# EAGLE board INCUBATOR (EAGLE 9.6.2)
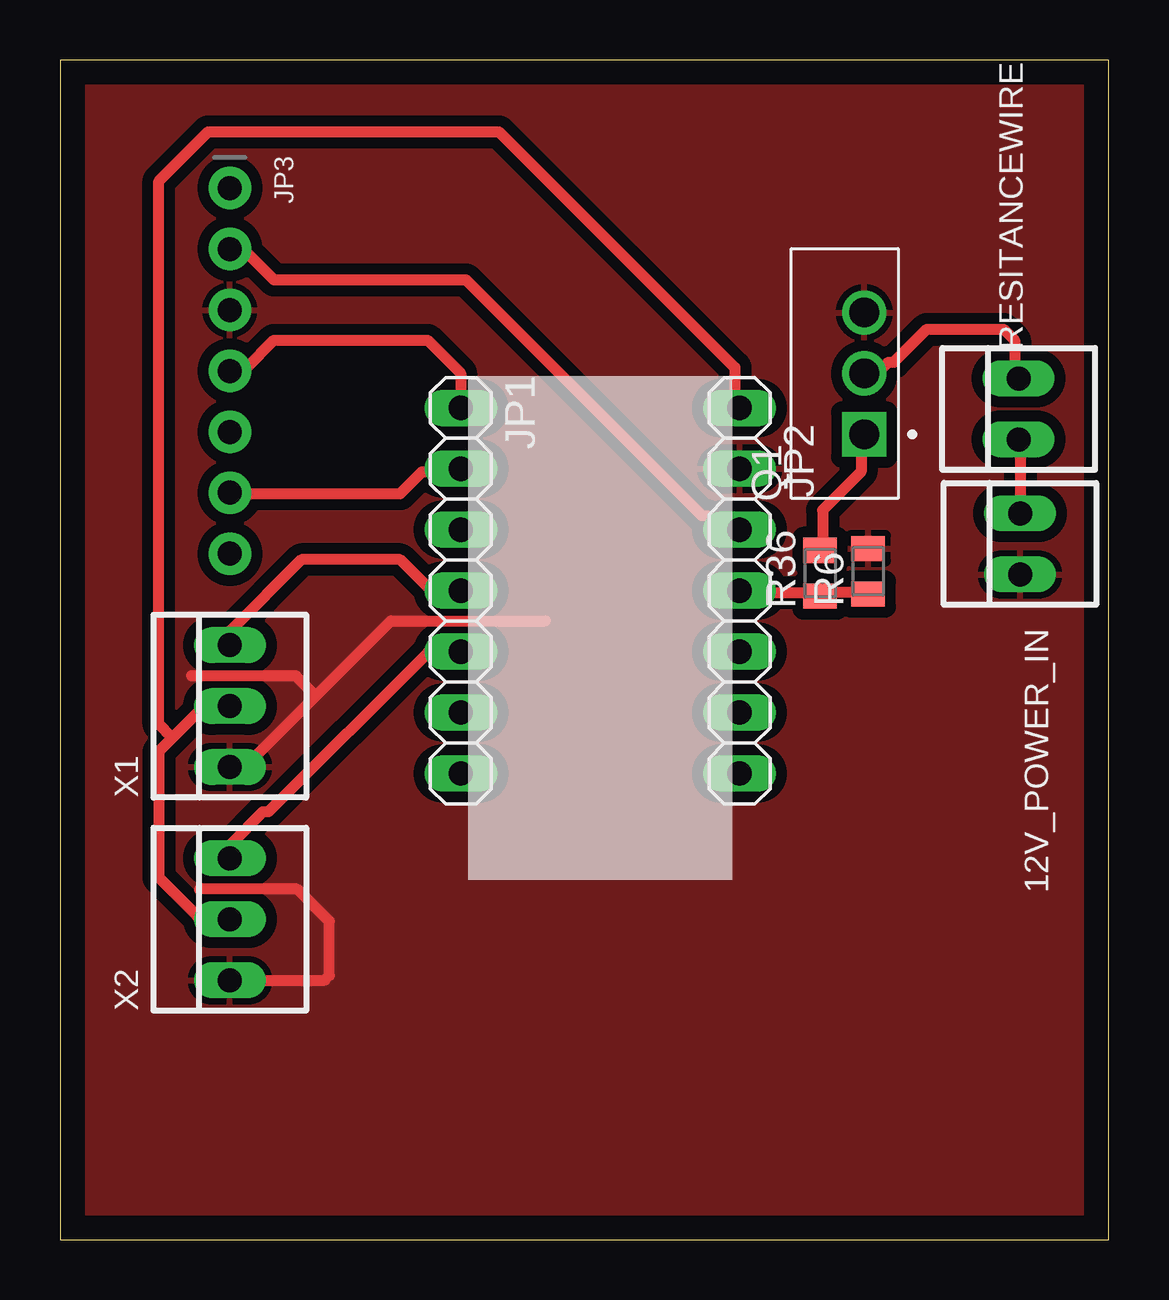
[diagram p0: board, top side]

Size 43.69 x 49.17 mm. Coordinates in mm from the lower left corner, seen from the top.
Outline: 0,0 43.69,0 43.69,49.17 0,49.17 0,0
Copper layers (1*16): Top 0.035mm / dielectric 1.5mm / Bottom 0.035mm
Design rules "default *": minimum track width 18mil, minimum drill 0.35mm, track to track 18mil, track to pad 18mil, pad to pad 18mil, via to via 18mil, smd to smd 18mil, copper to edge 40mil, drill to drill 6mil, minimum pad ring 10mil, minimum via ring 8mil, stop-mask expansion 4mil, vias tented up to drill 0mil, thermal gap 10mil

## Footprints (pad centres in the part's own frame; a part is rotated, then mirrored left to right if it is on the bottom)
22-23-2021 = drill 1 long: 1 -1.27,0; 2 1.27,0
1X07 = drill 1.016 long: 1 -7.62,0; 2 -5.08,0; 3 -2.54,0; 4 0,0; 5 2.54,0; 6 5.08,0; 7 7.62,0
1X07_ROUND_70 = drill 1 pad 1.778: 1 -7.62,0; 2 -5.08,0; 3 -2.54,0; 4 0,0; 5 2.54,0; 6 5.08,0; 7 7.62,0
TO254P1041X444X2933-3 = drill 1.23 pad 1.85 square: 1 0,0 | drill 1.23 pad 1.85: 2 2.54,0; 3 5.08,0
RESC2012X70N = smd 1.05 x 1.4: 1 -0.95,0; 2 0.95,0
22-23-2031 = drill 1 long: 1 -2.54,0; 2 0,0; 3 2.54,0

## Placement (x,y rotation side)
12V_POWER_IN  22-23-2021  [22-23-2021]  40,29 90 top
JP1  [1X07]  16.7,27.05 270 top
JP2  [1X07]  28.32,27.05 270 top
JP3  [1X07_ROUND_70]  7.08,36.21 270 top
Q1  RFP30N06LE  [TO254P1041X444X2933-3]  33.51,33.56 90 top
R6  100k  [RESC2012X70N]  33.67,27.86 90 top
R36  220  [RESC2012X70N]  31.67,27.78 90 top
RESITANCEWIRE  22-23-2021  [22-23-2021]  39.94,34.62 90 top
X1  22-23-2031  [22-23-2031]  7.08,22.24 90 top
X2  22-23-2031  [22-23-2031]  7.08,13.35 90 top

## Library data of the parts
12V_POWER_IN RESITANCEWIRE = con-molex; MF: MOLEX; MPN: 22-23-2021; OC_FARNELL: 1462926; OC_NEWARK: 25C3832
JP1 JP2 = pinhead
JP3 = microbuilder
Q1 = IRF3205; AVAILABILITY: Not in stock; DESCRIPTION: N-Channel 55V 110A (Tc) 200W (Tc) Through Hole TO-220AB; MF: Infineon Technologies; MP: IRF3205; PACKAGE: TO-220 Infineon; PRICE: None
R6 R36 = ipc-7351-resistor
X1 X2 = con-molex; MF: MOLEX; MPN: 22-23-2031; OC_FARNELL: 1462950; OC_NEWARK: 30C0862

## Nets
5V: JP2.1 X1.2 X2.2
12V: 12V_POWER_IN.2 RESITANCEWIRE.1
BME_SCL_SCK/GPIO34: JP1.1 JP3.4
BME_SDA_SDI/GPIO33: JP1.2 JP3.6
CS_5V: JP3.7
GND [power]: 12V_POWER_IN.1 JP2.2 JP3.3 Q1.3 R6.2 X1.1 X2.1
GPIO16/HEATER: JP2.4 R6.1 R36.1
GPIO17: JP2.5
GPIO18: JP2.6
GPIO35: JP1.7
GPIO36: JP1.6
GPIO39: JP1.3
GPIO48: JP2.7
HOTEND-GND [power]: Q1.2 RESITANCEWIRE.2
N$2: JP3.1
N$71: Q1.1 R36.2
SDO/ADR_3V: JP3.5
TRAY_SERVO/GPIO38: JP1.4 X1.3
VDD3V: JP2.3 JP3.2
VENT_SERVO/GPIO37: JP1.5 X2.3

## Tracks (layer width: path | path; a pad name or v marks a point on that pad's centre or on a via)
5V
  Top 0.457: 4.69,20.92 5.94,22.17 6.86,22.17 X1.2 | 4.69,20.92 4.12,20.34 4.12,15.09 5.71,13.49 6.86,13.49 X2.2 | 4.69,20.92 4.12,21.49 4.12,44.12 6.17,46.18 18.29,46.18 28.12,36.35 28.12,34.75 JP2.1
12V
  Top 0.457: 12V_POWER_IN.2 40.01,30.4 40.01,33.15 RESITANCEWIRE.1
BME_SCL_SCK/GPIO34
  Top 0.457: JP1.1 16.69,34.75 16.69,36.12 15.32,37.49 8.91,37.49 7.77,36.35 7.09,36.35 JP3.4
BME_SDA_SDI/GPIO33
  Top 0.457: JP1.2 16.69,32 15.09,32 14.17,31.09 7.09,31.09 JP3.6
GND
  Top 0.457: X1.1 7.7,19.7 10.67,22.67 | 20.23,25.79 13.79,25.79 10.67,22.67 | 10.67,22.67 9.83,23.5 5.47,23.5 | X2.1 11.03,10.81 11.23,11.01 11.23,13.27 9.88,14.62 5.84,14.62 5.82,14.6
  pour Top: -0.35,49.72 44.1,49.72 44.1,-0.08 -0.35,-0.08
GPIO16/HEATER
  Top 0.457: R6.1 33.6,26.98 31.77,26.98 R36.1 31.55,26.98 28.35,26.98 JP2.4
HOTEND-GND
  Top 0.457: RESITANCEWIRE.2 39.78,35.89 39.78,37.49 39.32,37.95 36.12,37.95 34.75,36.58 34.52,36.58 34.06,36.12 33.6,36.12 Q1.2
N$71
  Top 0.457: R36.2 31.77,28.8 31.77,30.4 33.38,32 33.38,33.38 Q1.1
TRAY_SERVO/GPIO38
  Top 0.457: X1.3 7.09,24.92 7.09,25.38 10.06,28.35 14.17,28.35 15.32,27.2 16.69,27.2 JP1.4
VDD3V
  Top 0.457: JP2.3 28.12,29.72 27.43,29.72 26.98,30.18 26.75,30.18 16.92,40.01 8.91,40.01 7.77,41.15 7.09,41.15 JP3.2
VENT_SERVO/GPIO37
  Top 0.457: X2.3 7.09,16 7.09,16.46 8.46,17.83 8.69,17.83 15.32,24.46 16.69,24.46 JP1.5